# EAGLE board Ex Sensors (EAGLE 7.6.0)

Size 27 x 27 mm. Coordinates in mm from the lower left corner, seen from the top.
Outline: 0,0 27,0 27,27 0,27 0,0
Copper layers (1*16): Top 0.035mm / dielectric 1.5mm / Bottom 0.035mm
Design rules "default": minimum track width 10mil, minimum drill 24mil, track to track 8mil, track to pad 8mil, pad to pad 8mil, via to via 8mil, smd to smd 8mil, copper to edge 40mil, drill to drill 8mil, minimum pad ring 10mil, minimum via ring 8mil, stop-mask expansion 4mil, vias tented up to drill 0mil, thermal gap 10mil

## Footprints (pad centres in the part's own frame; a part is rotated, then mirrored left to right if it is on the bottom)
B3F-10XX = drill 1.016 long: 1 -3.251,2.261; 2 3.251,2.261; 3 -3.251,-2.261; 4 3.251,-2.261
1X05 = drill 1.016 long: 1 -5.08,0; 2 -2.54,0; 3 0,0; 4 2.54,0; 5 5.08,0
CHIPLED_0805 = smd 1.2 x 1.2: A 0,-1.05; C 0,1.05
1X02 = drill 1.016 long: 1 -1.27,0; 2 1.27,0
R0805 = smd 1.1 x 1.4: 1 -1,0; 2 1,0
1X03 = drill 1.016: 1 -2.54,0; 2 0,0; 3 2.54,0
1X10-BIG = drill 1.016 pad 1.778 octagon: 1 -11.43,0; 2 -8.89,0; 3 -6.35,0; 4 -3.81,0; 5 -1.27,0; 6 1.27,0; 7 3.81,0; 8 6.35,0; 9 8.89,0; 10 11.43,0
SO-08 = smd 0.6 x 2.2: 1 -1.905,-2.6; 2 -0.635,-2.6; 3 0.635,-2.6; 4 1.905,-2.6; 5 1.905,2.6; 6 0.635,2.6; 7 -0.635,2.6; 8 -1.905,2.6
SO16 = smd 0.6 x 2.2: 1 -4.445,-2.6; 2 -3.175,-2.6; 3 -1.905,-2.6; 4 -0.635,-2.6; 5 0.635,-2.6; 6 1.905,-2.6; 7 3.175,-2.6; 8 4.445,-2.6; 9 4.445,2.6; 10 3.175,2.6; 11 1.905,2.6; 12 0.635,2.6; 13 -0.635,2.6; 14 -1.905,2.6; 15 -3.175,2.6; 16 -4.445,2.6

## Placement (x,y rotation side)
A1  [B3F-10XX]  13.5,23 0 top
JP1  [1X05]  2,12 270 top
LED  [CHIPLED_0805]  9,16.5 270 top
LS0_1K_A7  [1X02]  2,22.5 270 top
LS0_R_PDOWN_1K  [R0805]  19.5,17 90 top
MS0_VCC_A0_GND  [1X03]  25.2,20.5 270 top
NUSBIO_IN  PINHD-1X10  [1X10-BIG]  13.5,2 180 top
R_LED_1K  [R0805]  17,17 90 top
S1_R_PD_1K  [R0805]  13,17 270 top
TEMP_SENSOR  TC77_SO08-5.0V-SO08  [SO-08]  23,9.5 180 top
U$1  MCP3008SL  [SO16]  12.5,9.5 180 top

## Library data of the parts
A1 = switch-omron; MPN: B3F-1000; OC_FARNELL: 176432; OC_NEWARK: 36M3542
JP1 LS0_1K_A7 = pinhead
LED LS0_R_PDOWN_1K MS0_VCC_A0_GND NUSBIO_IN R_LED_1K S1_R_PD_1K = adafruit
TEMP_SENSOR = temperiture; MPN: TC77-5.0MOA; OC_FARNELL: 1439514; PACKAGE: SO08; SUPPLIER: MICROCHIP
U$1 = MCP3008

## Nets
A3: U$1.4
A4: U$1.5
A5: JP1.1 U$1.6
A6: JP1.2 U$1.7
A7: JP1.3 U$1.8
GND: JP1.5 LS0_R_PDOWN_1K.2 MS0_VCC_A0_GND.3 NUSBIO_IN.10 R_LED_1K.2 S1_R_PD_1K.1 TEMP_SENSOR.4 U$1.9 U$1.14
N$1: NUSBIO_IN.1 TEMP_SENSOR.2 U$1.13
N$2: NUSBIO_IN.2 U$1.11
N$3: NUSBIO_IN.3 TEMP_SENSOR.1 U$1.12
N$4: NUSBIO_IN.5 TEMP_SENSOR.7
N$5: NUSBIO_IN.4 U$1.10
N$6: LED.C R_LED_1K.1
N$7: LED.A NUSBIO_IN.6
N$10: MS0_VCC_A0_GND.2 U$1.1
N$11: LS0_1K_A7.2 LS0_R_PDOWN_1K.1 U$1.3
N$12: A1.4 S1_R_PD_1K.2 U$1.2
VCC: A1.1 JP1.4 LS0_1K_A7.1 MS0_VCC_A0_GND.1 NUSBIO_IN.9 TEMP_SENSOR.8 U$1.15 U$1.16

## Tracks (layer width: path | path; a pad name or v marks a point on that pad's centre or on a via)
A5  (1 unrouted)
A6  (1 unrouted)
A7  (1 unrouted)
GND  (8 unrouted)
N$1  (2 unrouted)
N$2  (1 unrouted)
N$3  (2 unrouted)
N$4  (1 unrouted)
N$5  (1 unrouted)
N$6  (1 unrouted)
N$7  (1 unrouted)
N$10  (1 unrouted)
N$11  (2 unrouted)
N$12  (2 unrouted)
VCC  (7 unrouted)

## Text on the board
tNames: VCC | LIGHT / SENSOR A2 | A0 | GND | A5 | + | MOTION SENSOR | A6 | A7 | VCC | GND | GND | VCC | 7 | 6 | 5 | 4 | 3 | 2 | 1 | 0
bNames: MadeInTheUSB.net | Sensors Extension | Sensors Extension | PCBv2 - 2017.03